# EAGLE board CT_schematic (EAGLE 7.6.0)

Size 100 x 80 mm. Coordinates in mm from the lower left corner, seen from the top.
Outline: 0,0 100,0 100,80 0,80 0,0
Copper layers (1*16): Top 0.035mm / dielectric 1.5mm / Bottom 0.035mm
Design rules "default": minimum track width 10mil, minimum drill 24mil, track to track 8mil, track to pad 8mil, pad to pad 8mil, via to via 8mil, smd to smd 8mil, copper to edge 40mil, drill to drill 8mil, minimum pad ring 10mil, minimum via ring 8mil, stop-mask expansion 4mil, vias tented up to drill 0mil, thermal gap 10mil

## Footprints (pad centres in the part's own frame; a part is rotated, then mirrored left to right if it is on the bottom)
C0603 = smd 0.8 x 0.8: 1 -0.762,0; 2 0.762,0
C0402 = smd 0.5 x 0.5: 1 -0.508,0; 2 0.508,0
EXV-9B = smd 2.718 x 1.778: 1 -2.108,0; 2 2.108,0
EXV-9H = smd 3.505 x 1.676: 1 -2.857,0; 2 2.857,0
L0603 = smd 0.8 x 0.8: 1 -0.762,0; 2 0.762,0
PJ-037B_PACKAGE = drill 3.7 square: 1 12,0 | drill 3.2 square: 2 6,0
R0603 = smd 0.8 x 0.8: 1 -0.762,0; 2 0.762,0
LQFP64 = smd 0.3 x 1.2: 1 -3.75,-5.75; 2 -3.25,-5.75; 3 -2.75,-5.75; 4 -2.25,-5.75; 5 -1.75,-5.75; 6 -1.25,-5.75; 7 -0.75,-5.75; 8 -0.25,-5.75; 9 0.25,-5.75; 10 0.75,-5.75; 11 1.25,-5.75; 12 1.75,-5.75; 13 2.25,-5.75; 14 2.75,-5.75; 15 3.25,-5.75; 16 3.75,-5.75; 33 3.75,5.75; 34 3.25,5.75; 35 2.75,5.75; 36 2.25,5.75; 37 1.75,5.75; 38 1.25,5.75; 39 0.75,5.75; 40 0.25,5.75; 41 -0.25,5.75; 42 -0.75,5.75; 43 -1.25,5.75; 44 -1.75,5.75; 45 -2.25,5.75; 46 -2.75,5.75; 47 -3.25,5.75; 48 -3.75,5.75 | smd 1.2 x 0.3: 17 5.75,-3.75; 18 5.75,-3.25; 19 5.75,-2.75; 20 5.75,-2.25; 21 5.75,-1.75; 22 5.75,-1.25; 23 5.75,-0.75; 24 5.75,-0.25; 25 5.75,0.25; 26 5.75,0.75; 27 5.75,1.25; 28 5.75,1.75; 29 5.75,2.25; 30 5.75,2.75; 31 5.75,3.25; 32 5.75,3.75; 49 -5.75,3.75; 50 -5.75,3.25; 51 -5.75,2.75; 52 -5.75,2.25; 53 -5.75,1.75; 54 -5.75,1.25; 55 -5.75,0.75; 56 -5.75,0.25; 57 -5.75,-0.25; 58 -5.75,-0.75; 59 -5.75,-1.25; 60 -5.75,-1.75; 61 -5.75,-2.25; 62 -5.75,-2.75; 63 -5.75,-3.25; 64 -5.75,-3.75
SOIC-8 = smd 1.6 x 0.6: 1 -2.7,1.905 | smd 1.55 x 0.6: 2 -2.7,0.635; 3 -2.7,-0.635; 4 -2.7,-1.905; 5 2.7,-1.905; 6 2.7,-0.635; 7 2.7,0.635; 8 2.7,1.905
TST-110-05-T-D-RA = drill 1 pad 1.7 square: 1 0,0 | drill 1 pad 1.7: 2 0,2.54; 3 2.54,0; 4 2.54,2.54; 5 5.08,0; 6 5.08,2.54; 7 7.62,0; 8 7.62,2.54; 9 10.16,0; 10 10.16,2.54; 11 12.7,0; 12 12.7,2.54; 13 15.24,0; 14 15.24,2.54; 15 17.78,0; 16 17.78,2.54; 17 20.32,0; 18 20.32,2.54; 19 22.86,0; 20 22.86,2.54
MICRO_USB_AB = smd 0.4 x 1.35: 1 1.3,0.26; 2 0.65,0.26; 3 0,0.26; 4 -0.65,0.26; 5 -1.3,0.26 | drill 0.6 pad 0.95 long: 6 4.175,-2.54; 7 -4.175,-2.54 | drill 0.7 pad 1.1 long: 8 -2.225,0.46; 9 2.225,0.46
SOT143B = smd 1 x 0.7: 1 -0.75,-1 | smd 0.6 x 0.7: 2 0.95,-1; 3 0.95,1; 4 -0.95,1
ABS07-32.768KHZ-7-T = smd 1.1 x 2.4: 1 -2.5,0; 2 0,0
ASFL1 = smd 1.7 x 1.5: 1 -1.27,-1.1; 2 1.27,-1.1; 3 1.27,1.1; 4 -1.27,1.1
LP2954 = smd 1.6 x 0.6: 1 -2.475,1.905 | smd 1.55 x 0.6: 2 -2.475,0.635; 3 -2.475,-0.635; 4 -2.475,-1.905; 5 2.475,-1.905; 6 2.475,-0.635; 7 2.475,0.635; 8 2.475,1.905
SON-6 = smd 0.55 x 0.3: 1 -0.355,0.5 | smd 0.52 x 0.3: 2 -0.37,0; 3 -0.37,-0.5; 4 0.37,-0.5; 5 0.37,0; 6 0.37,0.5
SW_4-1437565-2 = smd 1.4 x 2.1: 1 -2.23,4.55; 2 -2.23,-4.55; 3 2.23,4.55; 4 2.23,-4.55
LGM67K-G1J2-24-Z = smd 0.8 x 1.4: A -2,0; C 0,0
NC7SZ125M5X = smd 1.3 x 0.7: 1 -1.3,0.95; 2 -1.3,0; 3 -1.3,-0.95; 4 1.3,-0.95; 5 1.3,0.95
DUMMY_PACKAGE_112 = drill 0.3: 1 0,-1; 2 1.5,-1; 3 3,-1

## Placement (x,y rotation side)
C1  1e-07  [C0603]  -27.94,58.42 0 top  (outside the outline)
C2  1e-07  [C0603]  -31.75,58.42 0 top  (outside the outline)
C3  1e-07  [C0603]  -35.56,58.42 0 top  (outside the outline)
C4  1e-07  [C0603]  -39.37,58.42 0 top  (outside the outline)
C5  4.7e-06  [C0603]  -24.13,58.42 0 top  (outside the outline)
C6  1e-07  [C0603]  -43.18,58.42 0 top  (outside the outline)
C7  1e-08  [C0603]  -46.99,58.42 0 top  (outside the outline)
C8  1e-06  [C0603]  -50.8,58.42 0 top  (outside the outline)
C9  1e-11  [C0402]  -19.05,63.5 0 top  (outside the outline)
C10  1e-11  [C0402]  -22.86,63.5 0 top  (outside the outline)
C11  1e-08  [C0402]  -26.67,63.5 0 top  (outside the outline)
C12  1e-07  [C0402]  -30.48,63.5 0 top  (outside the outline)
C13  1e-08  [C0402]  -34.29,63.5 0 top  (outside the outline)
C14  1e-06  [EXV-9B]  -30.48,45.72 0 top  (outside the outline)
C15  2.2e-06  [EXV-9B]  -39.37,45.72 0 top  (outside the outline)
C16  1e-07  [C0402]  -38.1,63.5 0 top  (outside the outline)
C17  0.0001  [EXV-9H]  -17.78,39.37 0 top  (outside the outline)
C18  0.0001  [EXV-9H]  -29.21,39.37 0 top  (outside the outline)
C19  1e-08  [C0402]  -41.91,63.5 0 top  (outside the outline)
C20  1e-08  [C0402]  -45.72,63.5 0 top  (outside the outline)
F1  240.0  [L0603]  -54.61,58.42 0 top  (outside the outline)
J1  PJ-037B  [PJ-037B_PACKAGE]  -27.94,7.62 0 top  (outside the outline)
R2  1000.0  [R0603]  -58.42,58.42 0 top  (outside the outline)
R4  4700.0  [R0603]  -62.23,58.42 0 top  (outside the outline)
R5  10000.0  [R0603]  -40.64,53.34 0 top  (outside the outline)
R6  10000.0  [R0603]  -45.72,53.34 0 top  (outside the outline)
R7  10000.0  [R0603]  -50.8,53.34 0 top  (outside the outline)
R8  10000.0  [R0603]  -55.88,53.34 0 top  (outside the outline)
R9  10000.0  [R0603]  -60.96,53.34 0 top  (outside the outline)
R10  100000.0  [R0603]  -15.24,53.34 0 top  (outside the outline)
R11  100000.0  [R0603]  -20.32,53.34 0 top  (outside the outline)
R12  164658.62  [R0603]  -60.96,45.72 0 top  (outside the outline)
R13  100000.0  [R0603]  -25.4,53.34 0 top  (outside the outline)
R14  10000.0  [R0603]  -15.24,58.42 0 top  (outside the outline)
R15  10000.0  [R0603]  -20.32,58.42 0 top  (outside the outline)
R16  9100.0  [R0603]  -15.24,63.5 0 top  (outside the outline)
R17  680000.0  [R0603]  -30.48,53.34 0 top  (outside the outline)
R18  120000.0  [R0603]  -35.56,53.34 0 top  (outside the outline)
U1  STM32L152RET6  [LQFP64]  -40.64,7.62 0 top  (outside the outline)
U2  AT25020B-SSHL-T  [SOIC-8]  -60.96,19.05 0 top  (outside the outline)
U3  TST-110-05-T-D-RA  [TST-110-05-T-D-RA]  -64.77,27.94 0 top  (outside the outline)
U4  47590-0001  [MICRO_USB_AB]  -54.61,7.62 0 top  (outside the outline)
U5  prtr5v0u2ax  [SOT143B]  -58.42,63.5 0 top  (outside the outline)
U6  ABS07-32.768KHZ-7-T  [ABS07-32.768KHZ-7-T]  -50.8,39.37 0 top  (outside the outline)
U7  ASFL1-25MHZ-NCS  [ASFL1]  -26.67,30.48 0 top  (outside the outline)
U8  LP2954AIMX/NOPB  [LP2954]  -44.45,19.05 0 top  (outside the outline)
U9  TPS3895ADRYR  [SON-6]  -13.97,67.31 0 top  (outside the outline)
U10  4-1437565-2  [SW_4-1437565-2]  -27.94,20.32 0 top  (outside the outline)
U11  Q65110A2395  [LGM67K-G1J2-24-Z]  -17.78,46.99 0 top  (outside the outline)
U12  nc7sz125m5x  [NC7SZ125M5X]  -46.99,45.72 0 top  (outside the outline)
U13  nc7sz125m5x  [NC7SZ125M5X]  -53.34,45.72 0 top  (outside the outline)
U14  Dummy  [DUMMY_PACKAGE_112]  -64.77,63.5 0 top  (outside the outline)

## Library data of the parts
C1-C20 F1 J1 R2 R4-R18 U1-U14 = circuit_tree

## Nets
CLK_CRYSTAL_U1_3: C9.1 U1.3 U6.1
CLK_CRYSTAL_U1_4: C10.1 U1.4 U6.2
CLK_U1_5: U1.5 U7.3
GND: C1.2 C2.2 C3.2 C4.2 C5.2 C6.2 C7.2 C8.2 C9.2 C10.2 C11.2 C12.2 C13.2 C14.2 C15.2 C16.2 C17.2 C18.2 C19.2 C20.2 J1.2 R2.2 R5.2 R13.2 R16.2 R18.2 U1.12 U1.18 U1.31 U1.47 U1.63 U2.4 U3.4 U3.6 U3.8 U3.10 U3.12 U3.14 U3.16 U3.18 U3.20 U4.5 U4.6 U4.7 U4.8 U4.9 U5.1 U7.2 U8.4 U9.2 U11.C U12.2 U12.3 U13.1 U13.3 U14.1
NET_U1_1: C6.1 U1.1
NET_U1_7: R4.1 U1.7 U13.4
NET_U1_13: C7.1 C8.1 F1.1 U1.13
NET_U1_60: R5.1 U1.60
NET_U1_61: U11.A
NET_U1_62: U10.3 U10.4
NET_U2_3: R6.1 U2.3
NET_U2_7: R8.1 U2.7
NET_U5_4: U4.1 U5.4
NET_U8_3: R11.1 U8.3
NET_U8_5: R10.1 U8.5
NET_U8_7: R12.2 R13.1 U8.7
NET_U9_1: R15.1 R16.1 U9.1
NET_U9_3: R17.2 R18.1 U9.3
NET_U9_4: R14.1 U9.4 U12.4 U13.2
NET_U10_1: R2.1 U10.1 U10.2
PROC_PC13_WKUP2: U1.2 U14.2
PROC_PH1_OSC_OUT: U1.6 U14.3
PROC_SPI1_MISO: U1.22 U2.2
PROC_SPI1_MOSI: U1.23 U2.5
PROC_SPI1_NSS: R7.1 U1.20 U2.1
PROC_SPI1_SCK: U1.21 U2.6
PROC_SYS_JTCK_SWCLK: U1.49 U3.9
PROC_SYS_JTDO_TRACESWO: U1.55 U3.13
PROC_SYS_JTMS_SWDIO: U1.46 U3.7
PROC_USB_DM: U1.44 U4.2 U5.3
PROC_USB_DP: U1.45 U4.3 U5.2
RST_OUT_U3_SRESET_B: R9.1 U3.15 U12.1
VCC_S1_14V1: C14.1 C17.1 C18.1 J1.1 R11.2 U8.8
VCC_TIER1_3V3: C1.1 C2.1 C3.1 C4.1 C5.1 C11.1 C12.1 C13.1 C15.1 C16.1 C19.1 C20.1 F1.2 R4.2 R6.2 R7.2 R8.2 R9.2 R10.2 R12.1 R14.2 R15.2 R17.1 U1.19 U1.32 U1.48 U1.64 U2.8 U3.1 U7.4 U8.1 U9.6 U12.5 U13.5

## Tracks (layer width: path | path; a pad name or v marks a point on that pad's centre or on a via)
CLK_CRYSTAL_U1_3  (2 unrouted)
CLK_CRYSTAL_U1_4  (2 unrouted)
CLK_U1_5  (1 unrouted)
GND  (55 unrouted)
NET_U1_1  (1 unrouted)
NET_U1_7  (2 unrouted)
NET_U1_13  (3 unrouted)
NET_U1_60  (1 unrouted)
NET_U1_62  (1 unrouted)
NET_U2_3  (1 unrouted)
NET_U2_7  (1 unrouted)
NET_U5_4  (1 unrouted)
NET_U8_3  (1 unrouted)
NET_U8_5  (1 unrouted)
NET_U8_7  (2 unrouted)
NET_U9_1  (2 unrouted)
NET_U9_3  (2 unrouted)
NET_U9_4  (3 unrouted)
NET_U10_1  (2 unrouted)
PROC_PC13_WKUP2  (1 unrouted)
PROC_PH1_OSC_OUT  (1 unrouted)
PROC_SPI1_MISO  (1 unrouted)
PROC_SPI1_MOSI  (1 unrouted)
PROC_SPI1_NSS  (2 unrouted)
PROC_SPI1_SCK  (1 unrouted)
PROC_SYS_JTCK_SWCLK  (1 unrouted)
PROC_SYS_JTDO_TRACESWO  (1 unrouted)
PROC_SYS_JTMS_SWDIO  (1 unrouted)
PROC_USB_DM  (2 unrouted)
PROC_USB_DP  (2 unrouted)
RST_OUT_U3_SRESET_B  (2 unrouted)
VCC_S1_14V1  (5 unrouted)
VCC_TIER1_3V3  (33 unrouted)